# Altium PCB IR2104S_V4.PcbDoc
Units mm, origin at the board's own origin, x right, y up, seen from the top; angles counter-clockwise.
Board outline 31.24 x 36.32 mm, 4 copper layers (Top Layer, GND1, GND2, Bottom Layer), stack 0.603 mm thick; 26 components, 22 nets, 87 pads, 104 vias.
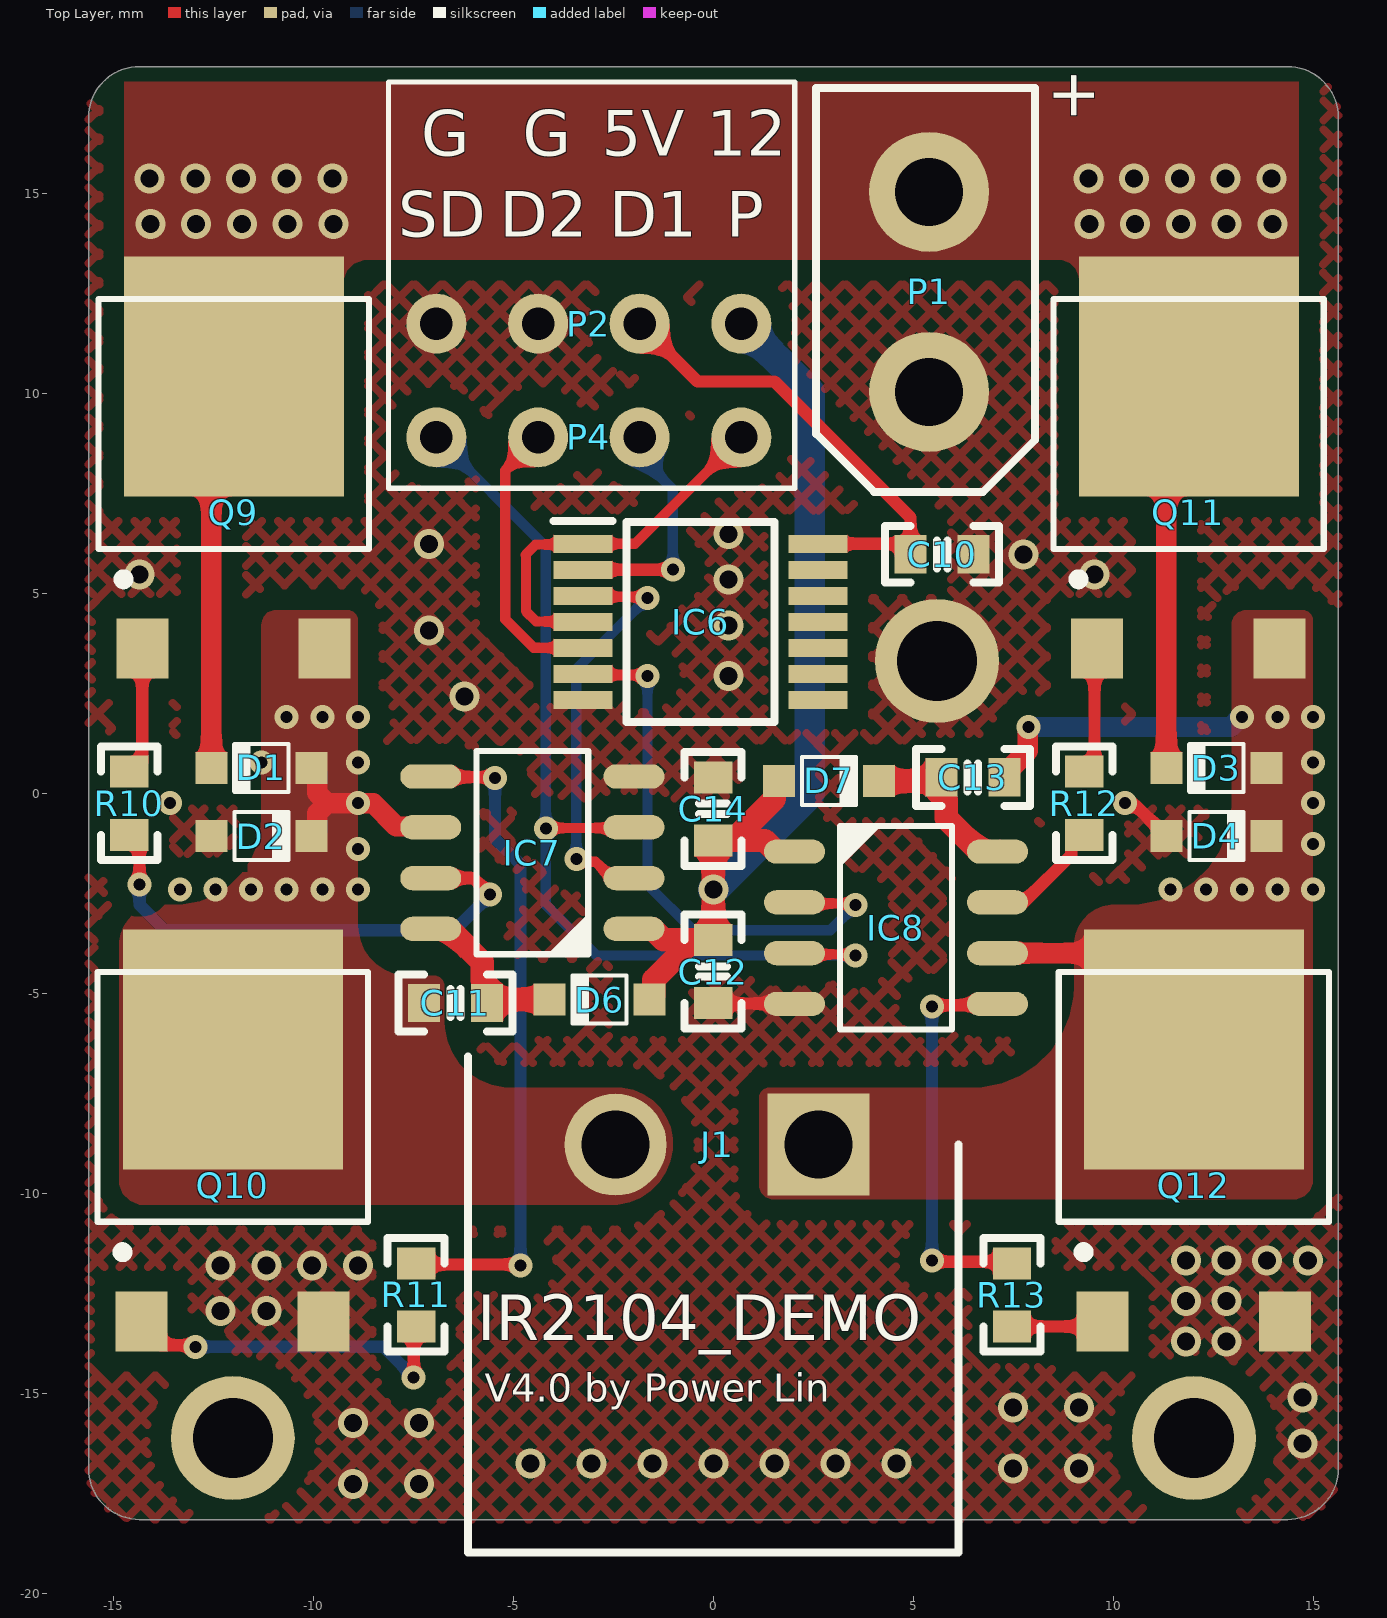
[diagram p0: Top Layer view]
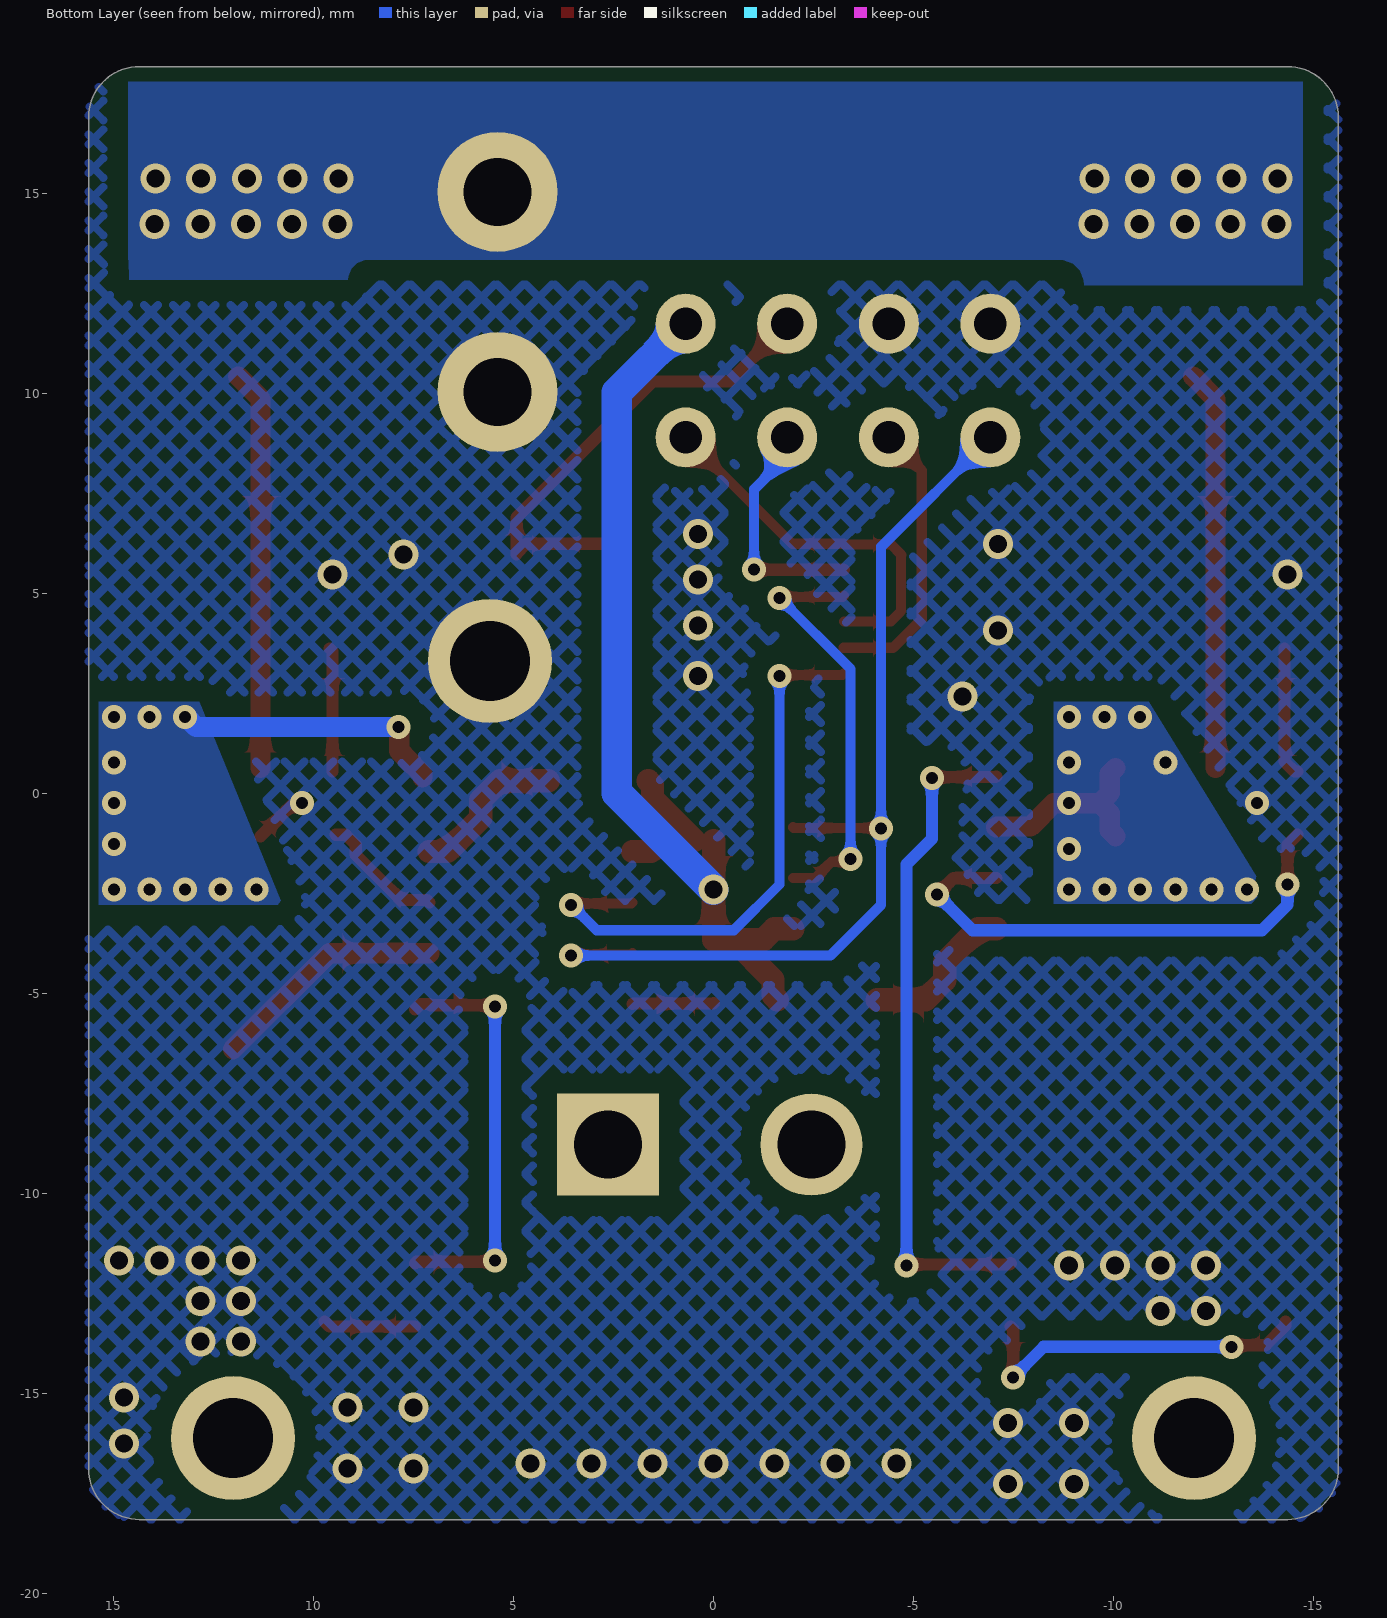
[diagram p1: Bottom Layer view, seen from below]
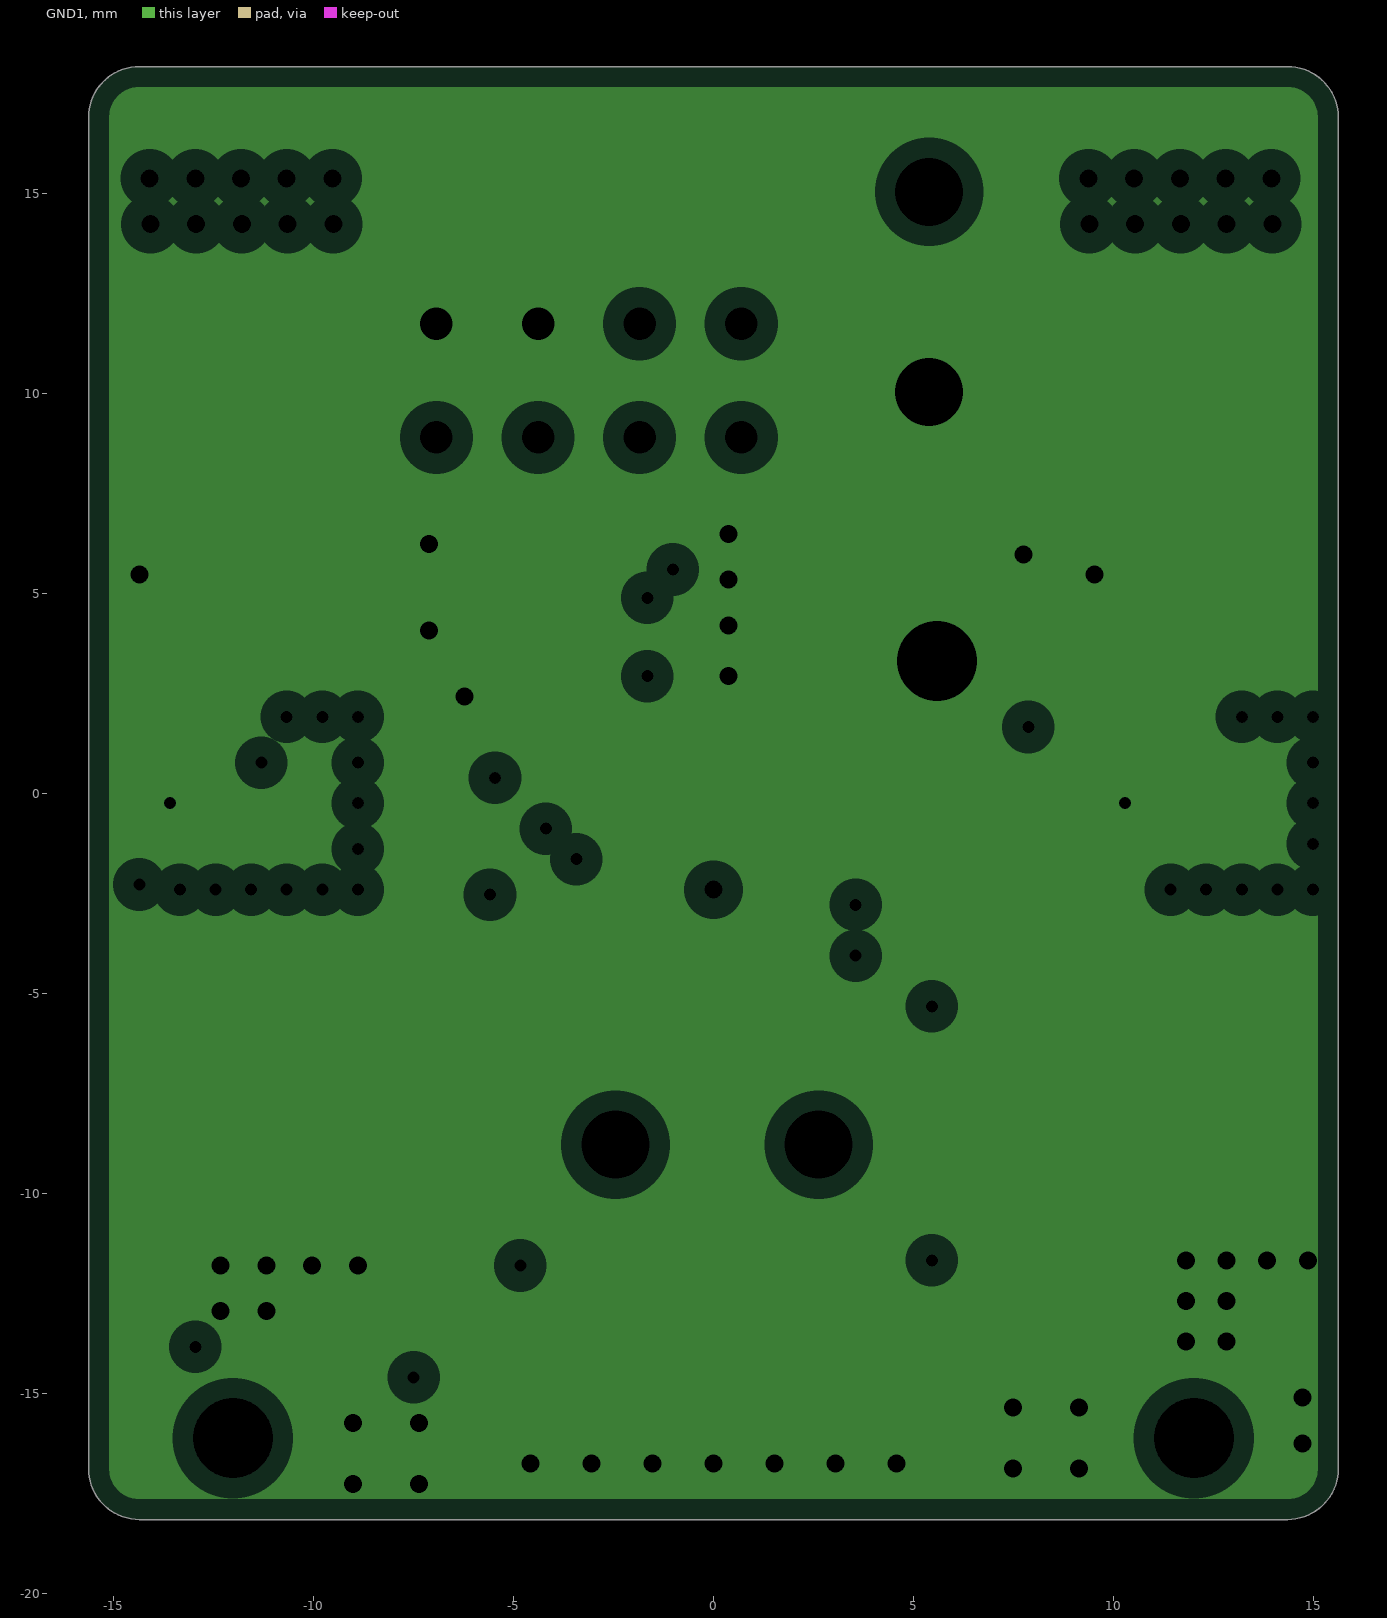
[diagram p2: GND1, clearances drawn from the general rule]
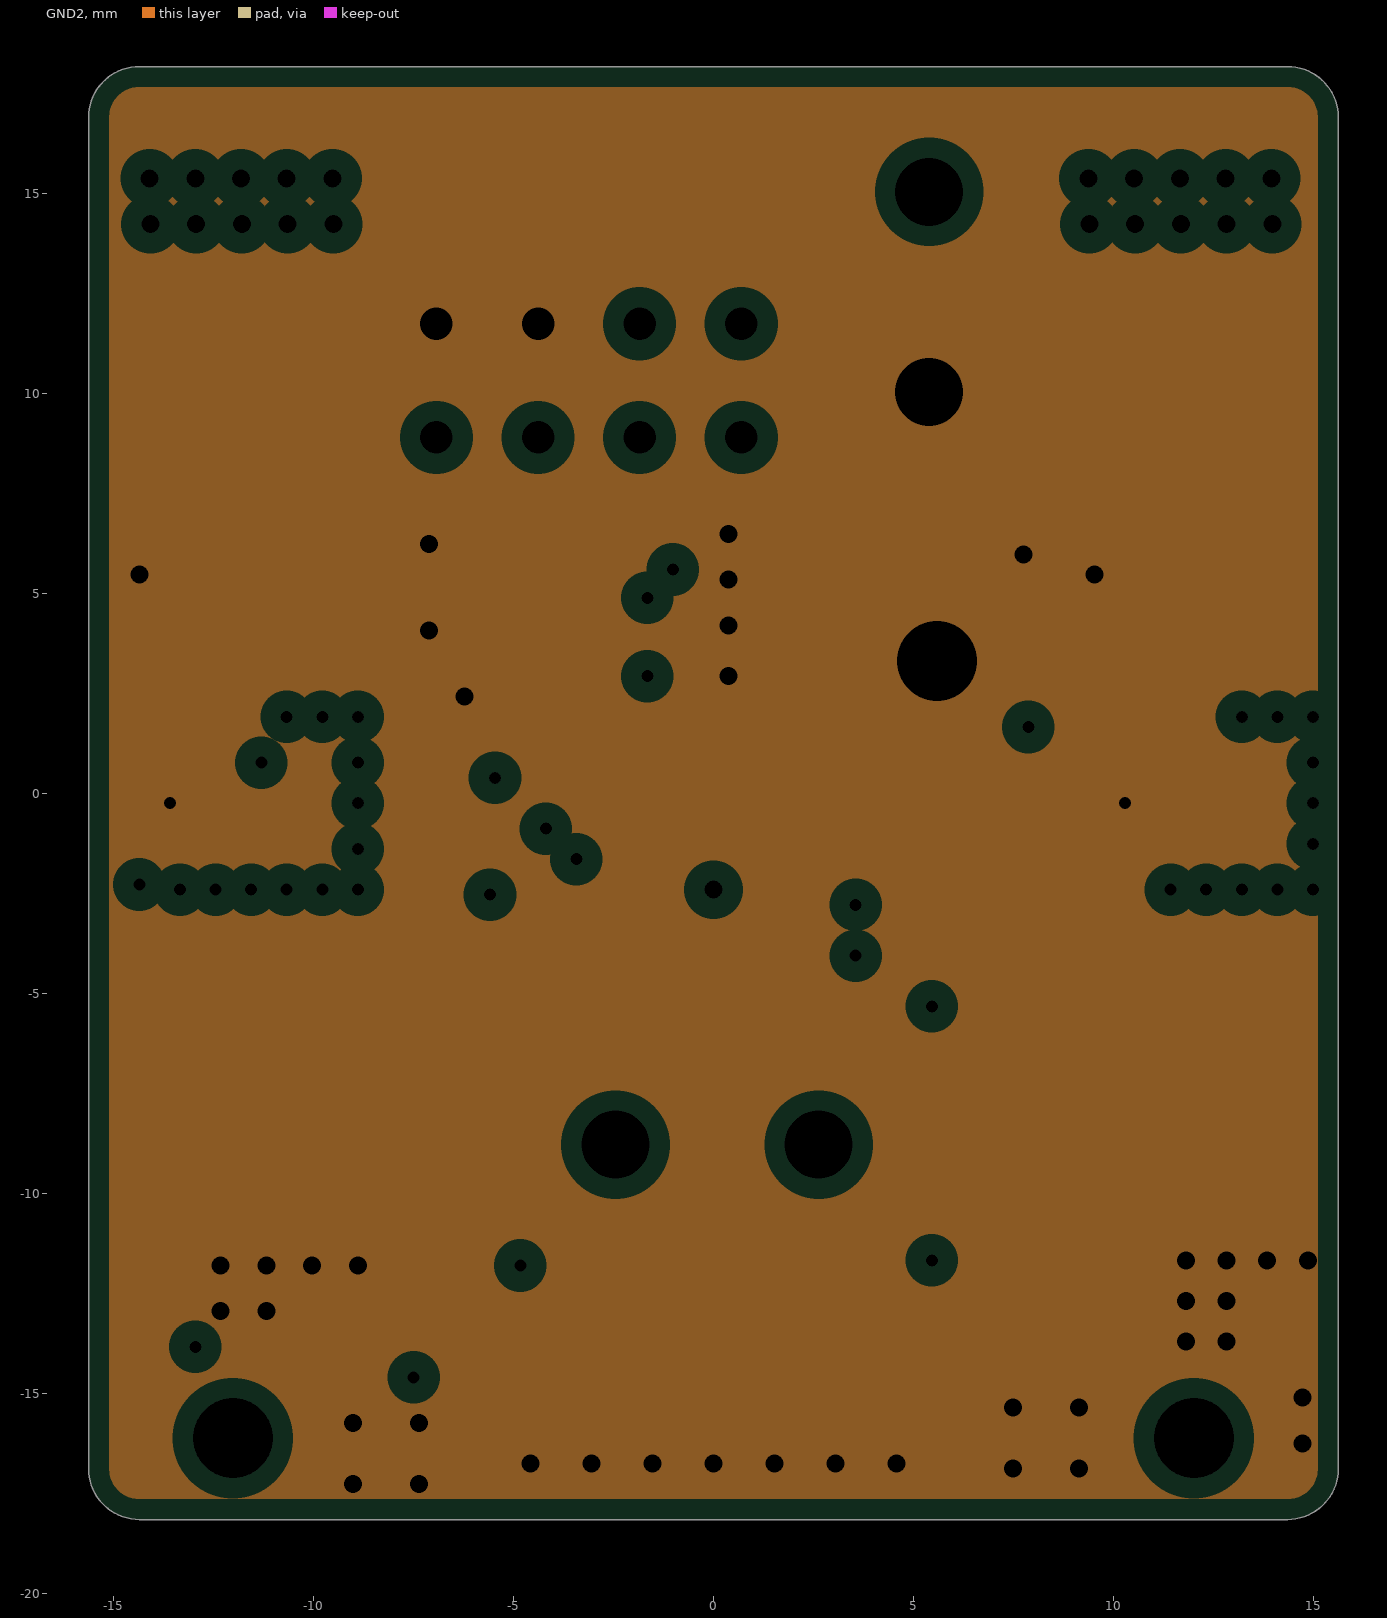
[diagram p3: GND2, clearances drawn from the general rule]
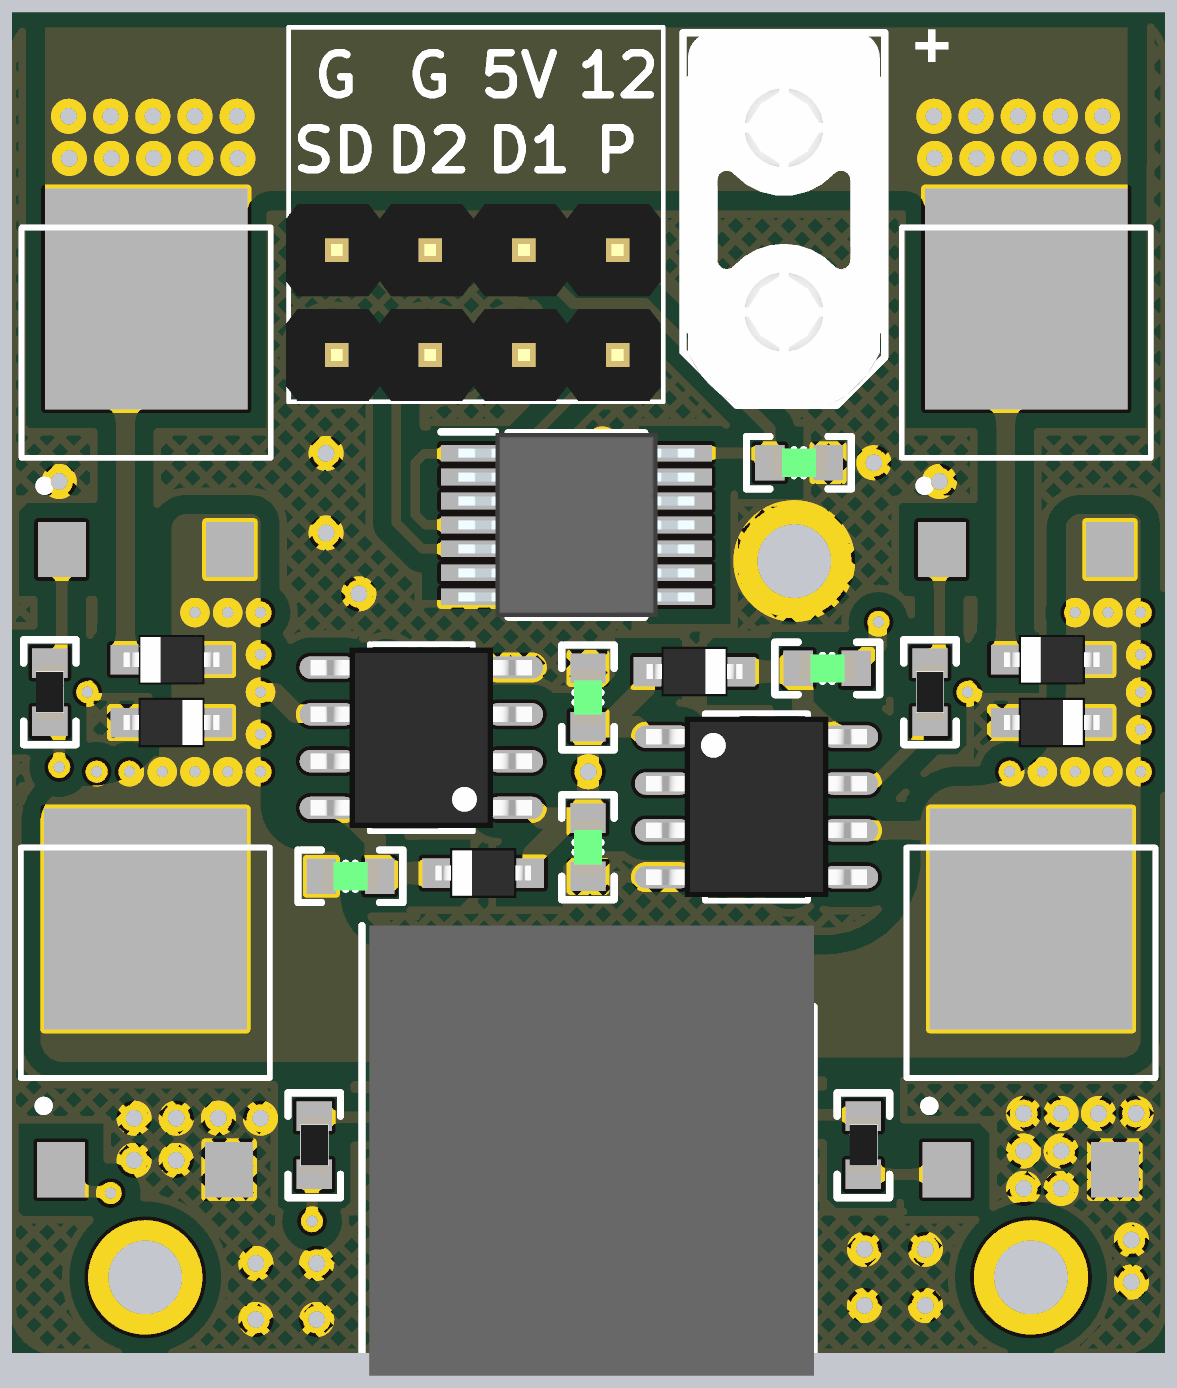
[diagram p4: 3D render of the assembled board from above, using the file's embedded part models]

## Layer stack, top to bottom
Top Solder: solder mask 0.0102, Solder Resist, Dk 3.5
Top Layer: signal copper 0.0356
Dielectric 2: prepreg 0.0711, PP-006, Dk 4.1
GND1: plane copper 0.035, net GND
Dielectric 1: dielectric 0.32, FR-4, Dk 4.8
GND2: plane copper 0.035, net GND
Dielectric 3: prepreg 0.0711, PP-006, Dk 4.1
Bottom Layer: signal copper 0.0356
Bottom Solder: solder mask 0.0102, Solder Resist, Dk 3.5

## Board outline
-15.621,-16.892 -15.621,16.892 cw(c-14.351,16.892) -14.351,18.162 14.351,18.162 cw(c14.351,16.892) 15.621,16.892 15.621,-16.892 cw(c14.351,-16.892) 14.351,-18.162 -14.351,-18.162 cw(c-14.351,-16.892)

## Design rules (kind name [scope] priority, off if disabled: settings)
Clearance [All] p1: gap=0.254 ignorepadtopadclearanceinfootprint=FALSE except(0: Arc-Hole Track-Hole SMDPad-Hole THPad-Hole Via-Hole Fill-Hole Poly-Hole Region-Hole Text-Hole; 0.508: Arc-Fill Arc-Poly Arc-Region Track-Fill Track-Poly Track-Region SMDPad-Fill SMDPad-Poly SMDPad-Region THPad-Fill THPad-Poly THPad-Region Via-Fill Via-Poly Via-Region Fill-Fill Fill-Poly Fill-Region Poly-Poly Poly-Region Region-Region)
PlaneClearance [All] p1: clearance=0.508
PlaneConnect [All] p1: planeconnectstyle=Direct reliefexpansion=0.508 reliefentries=4 reliefconductorwidth=0.254 reliefairgap=0.254
PolygonConnect [All] p1: connectstyle=Direct reliefconductorwidth=0.254 reliefentries=4 polygonreliefangle="90 Angle" airgapwidth=0.254
RoutingVias [All] p1: holewidth=0.3 width=0.6 viastyle="Through Hole" minholewidth=0.3 minwidth=0.6 maxholewidth=0.3 maxwidth=0.6
SolderMaskExpansion [All] p1: expansion=0.102 istentingtop=FALSE
Width [All] p1: maxlimit=2.54 minlimit=0.254 preferedwidth=0.254
28 further rules are at their usual default settings.

## Components (designator, comment, footprint, x,y, rotation, side; value= is the part's Value field where it differs from the comment)
C10 "100nF" CAP-0603 5.715,5.97 r180 top
C11 "1uF/25V" CAP-0603 -6.449,-5.248 r180 top
C12 "100nF" CAP-0603 -0.008,-4.461 r90 top
C13 "1uF/25V" CAP-0603 6.485,0.391 r0 top
C14 "100nF" CAP-0603 -0.008,-0.396 r270 top
D1 "SS14" SOD_323 -11.303,0.628 r0 top
D2 "SS14" SOD_323 -11.303,-1.077 r180 top
D3 "SS14" SOD_323 12.573,0.628 r0 top
D4 "SS14" SOD_323 12.573,-1.077 r180 top
D6 "SS14" SOD_323 -2.847,-5.162 r0 top
D7 "SS14" SOD_323 2.883,0.305 r180 top
IC6 "SN74HC08PW" TSSOP14 -0.32,4.281 r0 top
IC7 "IR2104S" SOIC_8 -4.528,-1.49 r90 top
IC8 "IR2104S" SOIC_8 4.564,-3.367 r270 top
J1 "WJ2EDGRC-5.08-2P" WJ2EDGRC-5.08-2P 2.632,-8.789 r180 top
P1 "XT30" XT30UPB-M 5.395,10.032 r90 top locked
P2 "HDR1x4_2.54" HDR1x4_2.54_180 0.696,11.735 r270 top
P4 "HDR1x4_2.54" HDR1x4_2.54_180 0.696,8.889 r270 top
Q9 "AP30H80K" TO-252 -14.279,3.615 r90 top
Q10 "AP30H80K" TO-252 -14.303,-13.207 r90 top
Q11 "AP30H80K" TO-252 9.594,3.615 r90 top
Q12 "AP30H80K" TO-252 9.723,-13.207 r90 top
R10 "51R" R-0603 -14.605,-0.253 r90 top
R11 "51R" R-0603 -7.432,-12.545 r270 top
R12 "51R" R-0603 9.271,-0.253 r90 top
R13 "51R" R-0603 7.463,-12.545 r270 top

## Footprints (in the part's own frame and the unit in brackets; to place one, negate y for a bottom-side part, rotate by r counter-clockwise, add the part's x,y. Pads: shape width x height; smd on the part's side, far side on the other; paste and mask are expansions set on the pad)
CAP-0603 [mm]
  rect 0.8x0.96 smd: 1(-0.79,0) 2(0.79,0)
  silkscreen extent -1.42,-0.71 1.42,0.71, body extent -0.76,-0.39 0.76,0.39, height 0.9
HDR1x4_2.54_180 [mm]
  round 1.5 hole 0.813: 1(0,0) 2(0,-2.54) 3(0,-5.08) 4(0,-7.62)
  body extent -1.25,-8.89 1.25,1.27, height 8.2
R-0603 [mm]
  rect 0.8x0.96 smd: 1(-0.79,0) 2(0.79,0)
  silkscreen extent -1.42,-0.71 1.42,0.71, body extent -0.76,-0.38 0.76,0.38, height 0.41
SOD_323 [mm]
  rect 0.8x0.8 smd: 1(1.25,0) 2(-1.25,0)
  silkscreen extent -0.72,-0.6 0.67,0.6, body extent -1.3,-0.68 1.3,0.68, height 1.1
SOIC_8 [mil]
  oval 24x60 smd: 1(-75,-100.02) 2(-25,-100.02) 3(25,-100.02) 4(75,-100.02) 5(75,99.98) 6(25,99.98) 7(-25,99.98) 8(-75,99.98)
  silkscreen extent -100,-55 100,55, body extent -96,-118 96,118, height 69
TO-252 [mm] "贴片MOS管"
  rect 1.5x1.3 smd: 1(0,0) 2(0,-4.56)
  rect 6x5.5 smd: 3(6.8,-2.29)
  silkscreen extent 1.61,-5.66 8.74,1.09, body extent -0.56,-5.65 9.54,1.08, height 2.37
TSSOP14 [mm]
  rect 1.475x0.45 smd: 1(-2.938,1.95) 2(-2.938,1.3) 3(-2.938,0.65) 4(-2.938,0) 5(-2.938,-0.65) 6(-2.938,-1.3) 7(-2.938,-1.95) 8(2.938,-1.95) 9(2.938,-1.3) 10(2.938,-0.65) 11(2.938,0) 12(2.938,0.65) 13(2.938,1.3) 14(2.938,1.95)
  silkscreen extent -3.67,-2.5 1.85,2.52, body extent -3.2,-2.5 3.2,2.5, height 1.2
WJ2EDGRC-5.08-2P [mm]
  rect 2.55x2.55 hole 1.7: 1(0,0)
  round 2.55 hole 1.7: 2(5.08,0)
  silkscreen extent -3.49,-2.2 8.77,10.2, body extent -3.49,-2.2 8.57,10, height 8.3
XT30UPB-M [mm]
  round 3 hole 1.7: 1(5,0) 2(0,0)
  silkscreen extent -2.5,-2.65 7.6,2.83, body extent -2.58,-2.71 7.62,2.89, height 10.68

## Part data
C10 C11 C12 C13 C14: library part CAP, "贴片电容", Package=0402, SuppliersPartNumber=C52923, ComponentLink1Description=供应商链接, ComponentLink1URL=http://www.szlcsc.com/product/details_53938.html, Supplier=LC
D1 D2 D3 D4 D6 D7: library part DIODE, "二极管", Package=SMA(DO-214AC), SuppliersPartNumber=C22452, ComponentLink1Description=供应商链接, ComponentLink1URL=http://www.szlcsc.com/product/details_23178.html, Supplier=LC
IC6: "Integrated Circuit", Arrow Part Number=SN74HCT08PW, Manufacturer_Name="Texas Instruments", Mouser Part Number=595-SN74HCT08PW, Arrow Price/Stock=https://www.arrow.com/en/products/sn74hct08pw/texas-instruments, Datasheet Link=http://www.ti.com/lit/gpn/SN74HCT08, Height=1.2mm, Manufacturer_Part_Number=SN74HCT08PW, Mouser Price/Stock=https://www.mouser.co.uk/ProductDetail/Texas-Instruments/SN74HCT08PW?qs=7KMwW2o1%252BmRuz7pKtn1cmg%3D%3D
IC7 IC8: "Integrated Circuit", Manufacturer_Name=Infineon, Datasheet Link=http://www.infineon.com/dgdl/ir2104.pdf?fileId=5546d462533600a4015355c7c1c31671, Height=1.75mm, Manufacturer_Part_Number=IR2104S
J1: "Connector", Manufacturer_Name="Ningbo Kangnex", Datasheet Link=https://datasheet.lcsc.com/szlcsc/Ningbo-Kangnex-Elec-WJ2EDGRC-5-08-2P_C3697.pdf, Height=8.3mm, Manufacturer_Part_Number=WJ2EDGRC-5.08-2P
P1: library part XT30/60, "XT30/60"
P2 P4: "Header"
Q9 Q10 Q11 Q12: library part N-MOS, "N 沟道 MOS", Manufacturer_Name=Nexperia, Manufacturer_Part_Number=SI2302DS, Mouser Part Number=N/A, RS Part Number=7983053P, Datasheet Link=https://assets.nexperia.com/documents/data-sheet/SI2302DS.pdf, Height=1.1mm, Mouser Price/Stock=https://www.mouser.com/Search/Refine.aspx?Keyword=N%2FA, RS Price/Stock=http://uk.rs-online.com/web/p/products/7983053P
R10 R11 R12 R13: library part RES, "贴片电阻", Package=0805, SuppliersPartNumber=C17798, Supplier=LC

## Free pads (board coordinates)
  round 3.1 hole 2: 3(-12.017,-16.128) 3(5.588,3.303) 3(12.009,-16.128)

## Via types
v1: diameter 0.75, hole 0.45, Top Layer to Bottom Layer, 62 vias
v2: diameter 0.6, hole 0.3, Top Layer to Bottom Layer, 42 vias

## Nets (pads, with @x,y where several pads share a name; then routed paths per layer and width w, separated by ;. In a path a pad name is that pad's centre, name@x,y a point inside that pad or via, vN(x,y) a via of type N, cw(c..) or ccw(c..) an arc to the next point about the centre after c; other vN are vias at no path point)
5V: C10.2 IC6.14 P2.2 | length 12.1
  Top Layer w0.305: P2.2 -0.397,10.288 1.524,10.288 4.925,6.887 C10.2 4.925,5.984 4.677,6.231 IC6.14
12V: C12.2 C14.2 D6.1 D7.1 IC7.1 IC8.1 P2.1 | length 26
  Top Layer w0.584: IC7.1 -1.524,-3.395 -1.248,-3.671 -0.496,-3.671 ; D6.1 -1.489,-5.055 -1.489,-4.664 -0.496,-3.671 ; C14.2 -0.004,-1.19 -0.004,-2.409 v1(0,-2.412) -0.004,-2.416 -0.004,-3.667 C12.2 -0.496,-3.671 ; D7.1 1.525,0.197 1.525,-0.142 0.48,-1.186 1.284,-1.186 1.56,-1.462 IC8.1
  Bottom Layer w0.762: v1(0,-2.412) 2.413,0.001 2.413,10.017 P2.1
DIR1A: IC6.2 P4.2 | length 5.9
  Top Layer w0.305: IC6.2 -3.255,5.585 -1.02,5.585 v2(-1.016,5.589)
  Bottom Layer w0.254: P4.2 -1.606,8.651 -1.606,8.186 -1.016,7.596 v2(-1.016,5.589)
DIR1B: IC6.5 P4.3 | length 7.1
  Top Layer w0.254: P4.3 -5.207,8.067 -5.207,4.347 -4.491,3.631 IC6.5
GND: C10.1 C12.1 C14.1 D2.1 D4.1 IC6.7 IC7.4 IC8.4 P1.2 P2.3 P2.4 pad.3@5.588,3.303 Q10.2 Q12.2 | length 3.4
  Top Layer w0.305: C12.1 0.003,-5.261 2.013,-5.261 IC8.4 ; v2(10.287,-0.253) 10.343,-0.31 10.556,-0.31 D4.1
  other v1: -9.017,-17.271 -7.366,-17.271 7.493,-16.89 9.144,-16.89 -4.572,-16.763 -3.048,-16.763 -1.524,-16.763 0,-16.763 1.524,-16.763 3.048,-16.763 4.572,-16.763 14.732,-16.255 -9.017,-15.747 -7.366,-15.747 7.493,-15.366 9.144,-15.366 14.732,-15.112 11.811,-13.715 12.827,-13.715 -12.319,-12.953 -11.176,-12.953 11.811,-12.699 12.827,-12.699 -12.319,-11.81 -11.176,-11.81 -10.033,-11.81 -8.89,-11.81 11.811,-11.683 12.827,-11.683 13.843,-11.683 14.859,-11.683 -6.223,2.414 0.381,2.922 -7.112,4.065 0.381,4.192 0.381,5.335 -14.351,5.462 9.525,5.462 7.747,5.97 -7.112,6.224 0.381,6.478
  other v2: -13.589,-0.253
M1A: C11.2 D1.1 D2.2 IC7.6 J1.2 Q9.2 Q10.3 | length 4.9
  Top Layer w0.508: D2.2 -9.907,-0.931 -9.907,-0.508 -9.652,-0.253 ; D1.1 -9.907,0.482 -9.907,0.001 -9.652,-0.253 ; IC7.6 -7.087,-0.836 -7.927,-0.836 -8.509,-0.253 -9.652,-0.253
  other v2: -13.335,-2.412 -12.446,-2.412 -11.557,-2.412 -10.668,-2.412 -9.779,-2.412 -8.89,-2.412 -8.89,-1.396 -8.89,-0.253 -11.303,0.763 -8.89,0.763 -10.668,1.906 -9.779,1.906 -8.89,1.906
M1B: C13.2 D3.1 D4.2 IC8.6 J1.1 Q11.2 Q12.3 | length 12.9
  Top Layer w0.508: IC8.6 9.607,-4.002 Q12.3 ; C13.2 7.275,0.471 7.856,1.052 7.856,1.634 v2(7.874,1.652)
  Bottom Layer w0.508: v2(7.874,1.652) 12.929,1.652 13.183,1.906 v2(13.208,1.906)
  other v2: 11.43,-2.412 12.319,-2.412 13.208,-2.412 14.097,-2.412 14.986,-2.412 14.986,-1.269 14.986,-0.253 14.986,0.763 14.097,1.906 14.986,1.906
NetC11_1: C11.1 D6.2 IC7.8 | length 4
  Top Layer w0.584: IC7.8 -6.617,-3.395 -5.779,-4.233 -5.779,-4.684 -5.301,-5.162 D6.2
NetC13_1: C13.1 D7.2 IC8.8 | length 4
  Top Layer w0.584: D7.2 5.337,0.305 5.815,-0.174 5.815,-0.624 6.653,-1.462 IC8.8
NetIC7_5: IC7.5 R11.1 | length 16.7
  Top Layer w0.305: R11.1 -7.404,-11.782 -4.854,-11.782 v2(-4.826,-11.81) ; IC7.5 -7.051,0.398 -5.478,0.398 v2(-5.461,0.382)
  Bottom Layer w0.305: v2(-5.461,0.382) -5.461,-1.142 -4.824,-1.78 -4.824,-11.808 v2(-4.826,-11.81)
NetIC7_7: IC7.7 R10.1 | length 12.9
  Top Layer w0.305: R10.1 -14.599,-1.044 -14.351,-1.291 v2(-14.351,-2.285) ; IC7.7 -6.002,-2.125 v2(-5.588,-2.539)
  Bottom Layer w0.305: v2(-14.351,-2.285) -14.351,-2.793 -13.716,-3.428 -6.477,-3.428 v2(-5.588,-2.539)
NetIC8_5: IC8.5 R13.1 | length 10.5
  Top Layer w0.305: v2(5.461,-11.683) 5.496,-11.719 7.427,-11.719 R13.1 ; v2(5.461,-5.333) 5.492,-5.303 7.073,-5.303 IC8.5 7.322,-5.272 IC8.5@7.463,-5.413
  Bottom Layer w0.305: v2(5.461,-11.683) v2(5.461,-5.333)
NetIC8_7: IC8.7 R12.1 | length 3.2
  Top Layer w0.305: IC8.7 7.162,-2.674 7.815,-2.674 8.943,-1.545 8.943,-1.291 9.191,-1.044 R12.1@9.445,-1.044
NetQ9_1: Q9.1 R10.2 | length 3.3
  Top Layer w0.305: R10.2 -14.527,0.536 -14.279,0.784 Q9.1
NetQ10_1: Q10.1 R11.2 | length 8.7
  Top Layer w0.305: Q10.1 -14.303,-13.307 -13.805,-13.805 -12.991,-13.805 v2(-12.954,-13.842) ; v2(-7.493,-14.604) -7.493,-13.395 R11.2
  Bottom Layer w0.305: v2(-12.954,-13.842) -8.255,-13.842 v2(-7.493,-14.604)
NetQ11_1: Q11.1 R12.2 | length 3.1
  Top Layer w0.305: R12.2@9.525,0.536 9.525,3.546 Q11.1
NetQ12_1: Q12.1 R13.2 | length 2.3
  Top Layer w0.305: R13.2 9.596,-13.334 Q12.1
PWM1: IC6.1 IC6.4 P4.1 | length 9.5
  Top Layer w0.254: IC6.1@-3.277,6.213 -4.441,6.213 -4.699,5.955 -4.69,5.946 -4.69,4.548 -4.432,4.291 IC6.4@-3.268,4.291 ; IC6.1 -1.963,6.231 P4.1
PWM1A: IC6.3 IC7.2 | length 10.5
  Top Layer w0.254: v2(-3.429,-1.65) -3.363,-1.717 -2.95,-1.717 -2.541,-2.125 IC7.2 ; IC6.3 -3.232,4.905 -1.677,4.905 v2(-1.651,4.879)
  Bottom Layer w0.254: v2(-3.429,-1.65) -3.429,3.101 v2(-1.651,4.879)
PWM1B: IC6.6 IC8.2 | length 14.3
  Top Layer w0.254: IC6.6 -3.229,2.951 -1.681,2.951 v2(-1.651,2.922) ; IC8.2 2.054,-2.763 3.525,-2.763 v2(3.556,-2.793)
  Bottom Layer w0.254: v2(-1.651,2.922) -1.651,-2.285 -0.508,-3.428 2.921,-3.428 v2(3.556,-2.793)
SD: IC7.3 IC8.3 P4.4 | length 24.9
  Top Layer w0.254: v2(-4.191,-0.888) -4.174,-0.872 -2.004,-0.872 IC7.3 ; IC8.3 2.054,-4.033 3.525,-4.033 v2(3.556,-4.063)
  Bottom Layer w0.254: P4.4 -4.191,6.156 -4.191,-2.793 -2.921,-4.063 v2(3.556,-4.063)
VM: D1.2 D3.2 P1.1 Q9.3 Q11.3 | length 20
  Top Layer w0.508: D1.2 -12.553,9.851 Q9.3 ; D3.2 11.323,9.854 Q11.3
  other v1: -14.075,14.225 -12.932,14.225 -11.789,14.225 -10.646,14.225 -9.503,14.225 9.398,14.225 10.541,14.225 11.684,14.225 12.827,14.225 13.97,14.225 -14.097,15.368 -12.954,15.368 -11.811,15.368 -10.668,15.368 -9.525,15.368 9.376,15.368 10.519,15.368 11.662,15.368 12.805,15.368 13.948,15.368
pads on no net: IC6.8 IC6.9 IC6.10 IC6.11 IC6.12 IC6.13

## Polygon pours and split planes (outlines as drawn)
GND on Top Layer "NONET_L01_P-001" (hatched 45Degree grid 0.508 track 0.203, pour order 7): 15.621,-16.89 cw(c14.351,-16.89) 14.351,-18.16 -14.351,-18.16 cw(c-14.351,-16.89) -15.621,-16.89 -15.621,16.892 cw(c-14.351,16.892) -14.351,18.162 14.351,18.162 cw(c14.351,16.892) 15.621,16.892
M1A on Top Layer "NONET_L01_P-001" (solid, pour order 4): -14.859,-9.651 ccw(c-14.224,-9.651) -14.224,-10.286 -2.54,-10.286 ccw(c-2.54,-8.762) -1.016,-8.762 ccw(c-2.413,-8.762) -2.413,-7.365 -5.08,-7.365 cw(c-5.08,-5.714) -6.731,-5.714 -6.731,-4.825 ccw(c-6.985,-4.825) -6.985,-4.571 -7.62,-4.571 cw(c-7.62,-3.301) -8.89,-3.301 -8.89,4.319 ccw(c-9.144,4.319) -9.144,4.573 -10.922,4.572 ccw(c-10.922,4.192) -11.303,4.192 -11.303,-0.634 cw(c-13.462,-0.635) -13.462,-2.793 -13.843,-2.793 ccw(c-13.843,-3.809) -14.859,-3.809
M1B on Top Layer "NONET_L01_P-001" (solid, pour order 3): 14.986,-9.651 cw(c14.478,-9.651) 14.478,-10.159 1.524,-10.159 cw(c1.524,-9.778) 1.143,-9.778 1.143,-7.619 cw(c1.397,-7.619) 1.397,-7.365 6.477,-7.365 ccw(c6.477,-4.825) 9.017,-4.825 9.017,-3.809 cw(c10.033,-3.809) 10.033,-2.793 10.414,-2.793 ccw(c10.414,-0.253) 12.954,-0.253 12.954,4.192 cw(c13.335,4.192) 13.335,4.573 14.732,4.573 cw(c14.732,4.319) 14.986,4.319
VM on Top Layer "NONET_L01_P-001" (solid, pour order 0): 8.636,13.336 cw(c8.636,12.828) 9.144,12.828 14.605,12.828 14.622,13.336 14.633,13.336 14.633,17.781 -14.732,17.78 -14.732,12.701 -9.271,12.701 cw(c-8.636,12.701) -8.636,13.336
GND on Bottom Layer "NONET_L01_P-001" (hatched 45Degree grid 0.508 track 0.203, pour order 9): 15.621,-16.89 cw(c14.351,-16.89) 14.351,-18.16 -14.351,-18.16 cw(c-14.351,-16.89) -15.621,-16.89 -15.621,16.892 cw(c-14.351,16.892) -14.351,18.162 14.351,18.162 cw(c14.351,16.892) 15.621,16.892
M1B on Bottom Layer "NONET_L01_P-001" (solid, pour order 8): 10.773,-2.793 15.367,-2.793 15.367,2.286 12.849,2.286
VM on Bottom Layer "NONET_L01_P-001" (solid, pour order 5): 8.636,13.336 cw(c8.636,12.828) 9.144,12.828 14.605,12.828 14.622,13.336 14.633,13.336 14.633,17.781 -14.732,17.78 -14.732,12.701 -9.271,12.701 cw(c-8.636,12.701) -8.636,13.336
M1A on Bottom Layer "NONET_L01_P-001" (solid, pour order 6): -14.015,-2.794 -8.509,-2.793 -8.509,2.286 -10.877,2.286
no net on Bottom Solder "NONET_L01_P-001" (solid): 14.732,15.83 ccw(c13.92,15.83) 13.92,16.642 13.589,16.638 -14.097,16.637 ccw(c-14.097,15.876) -14.859,15.876 -14.859,14.225 ccw(c-14.097,14.224) -14.097,13.463 13.97,13.463 ccw(c13.97,14.224) 14.732,14.225
GND on GND2 (split plane): 14.47,17.644 14.586,17.616 14.697,17.57 14.799,17.508 14.89,17.43 14.967,17.339 15.03,17.237 15.076,17.127 15.103,17.011 15.112,16.904 15.111,16.892 15.111,16.891 15.111,-16.891 15.111,-16.892 15.112,-16.904 15.103,-17.011 15.076,-17.127 15.03,-17.237 14.967,-17.339 14.89,-17.43 14.799,-17.508 14.697,-17.57 14.586,-17.616 14.47,-17.644 14.364,-17.652 14.351,-17.651 -14.351,-17.651 -14.364,-17.652 -14.47,-17.644 -14.586,-17.616 -14.697,-17.57 -14.799,-17.508 -14.89,-17.43 -14.967,-17.339 -15.03,-17.237 -15.076,-17.127 -15.103,-17.011 -15.112,-16.904 -15.111,-16.892 -15.111,16.891 -15.111,16.892 -15.112,16.904 -15.103,17.011 -15.076,17.127 -15.03,17.237 -14.967,17.339 -14.89,17.43 -14.799,17.508 -14.697,17.57 -14.586,17.616 -14.47,17.644 -14.364,17.652 -14.351,17.651 14.351,17.651 14.364,17.652
GND on GND1 (split plane): 14.47,17.644 14.586,17.616 14.697,17.57 14.799,17.508 14.89,17.43 14.967,17.339 15.03,17.237 15.076,17.127 15.103,17.011 15.112,16.904 15.111,16.892 15.111,16.891 15.111,-16.891 15.111,-16.892 15.112,-16.904 15.103,-17.011 15.076,-17.127 15.03,-17.237 14.967,-17.339 14.89,-17.43 14.799,-17.508 14.697,-17.57 14.586,-17.616 14.47,-17.644 14.364,-17.652 14.351,-17.651 -14.351,-17.651 -14.364,-17.652 -14.47,-17.644 -14.586,-17.616 -14.697,-17.57 -14.799,-17.508 -14.89,-17.43 -14.967,-17.339 -15.03,-17.237 -15.076,-17.127 -15.103,-17.011 -15.112,-16.904 -15.111,-16.892 -15.111,16.891 -15.111,16.892 -15.112,16.904 -15.103,17.011 -15.076,17.127 -15.03,17.237 -14.967,17.339 -14.89,17.43 -14.799,17.508 -14.697,17.57 -14.586,17.616 -14.47,17.644 -14.364,17.652 -14.351,17.651 14.351,17.651 14.364,17.652

## Silkscreen, mask and mechanical layers (free items; w line width, h text height)
Top Overlay:
  lines w0.127: -8.128,7.621 2.032,7.621 2.032,12.955 2.032,17.781 -8.128,17.781 -8.128,7.621
  text "G" at -7.305,15.939 h1.14
  text "G" at -4.765,15.939 h1.14
  text "5V" at -2.797,15.939 h1.14
  text "12" at -0.161,15.939 h1.14
  text "SD" at -7.877,13.907 h1.14
  text "D2" at -5.337,13.907 h1.14
  text "D1" at -2.606,13.907 h1.14
  text "P" at 0.315,13.907 h1.14
  text "IR2104_DEMO" at -5.904,-13.684 h1.14
  text "V4.0 by Power Lin" at -5.715,-15.219 h0.7
Mechanical 1:
  lines w0.127: 53.842,35.94 cw(c56.842,35.94) 56.842,38.941 ; 54.842,-10.059 101.842,-10.059 101.842,39.94 ; 56.842,-11.06 cw(c56.842,-8.059) 53.842,-8.059 53.842,38.94 103.842,38.94 ; 100.842,-11.06 ccw(c100.842,-8.059) 103.842,-8.059 ; 100.842,38.941 cw(c100.842,35.94) 103.842,35.94 ; -15.621,-16.892 ccw(c-14.351,-16.892) -14.351,-18.162 14.351,-18.162 ccw(c14.351,-16.892) 15.621,-16.892 15.621,16.892 ccw(c14.351,16.892) 14.351,18.162 -14.351,18.162 ccw(c-14.351,16.892) -15.621,16.892 -15.621,-16.892

## Text inside footprints (layer, text, board x,y; h text height)
P1: Top Overlay "+" at 9.906,16.765 h2 r90